# Altium PCB Develop_board.PcbDoc
Units mm, origin at the board's own origin, x right, y up, seen from the top; angles counter-clockwise.
Board outline 45 x 45 mm, 2 copper layers (Top Layer, Bottom Layer); 38 components, 26 nets, 180 pads, 79 vias.
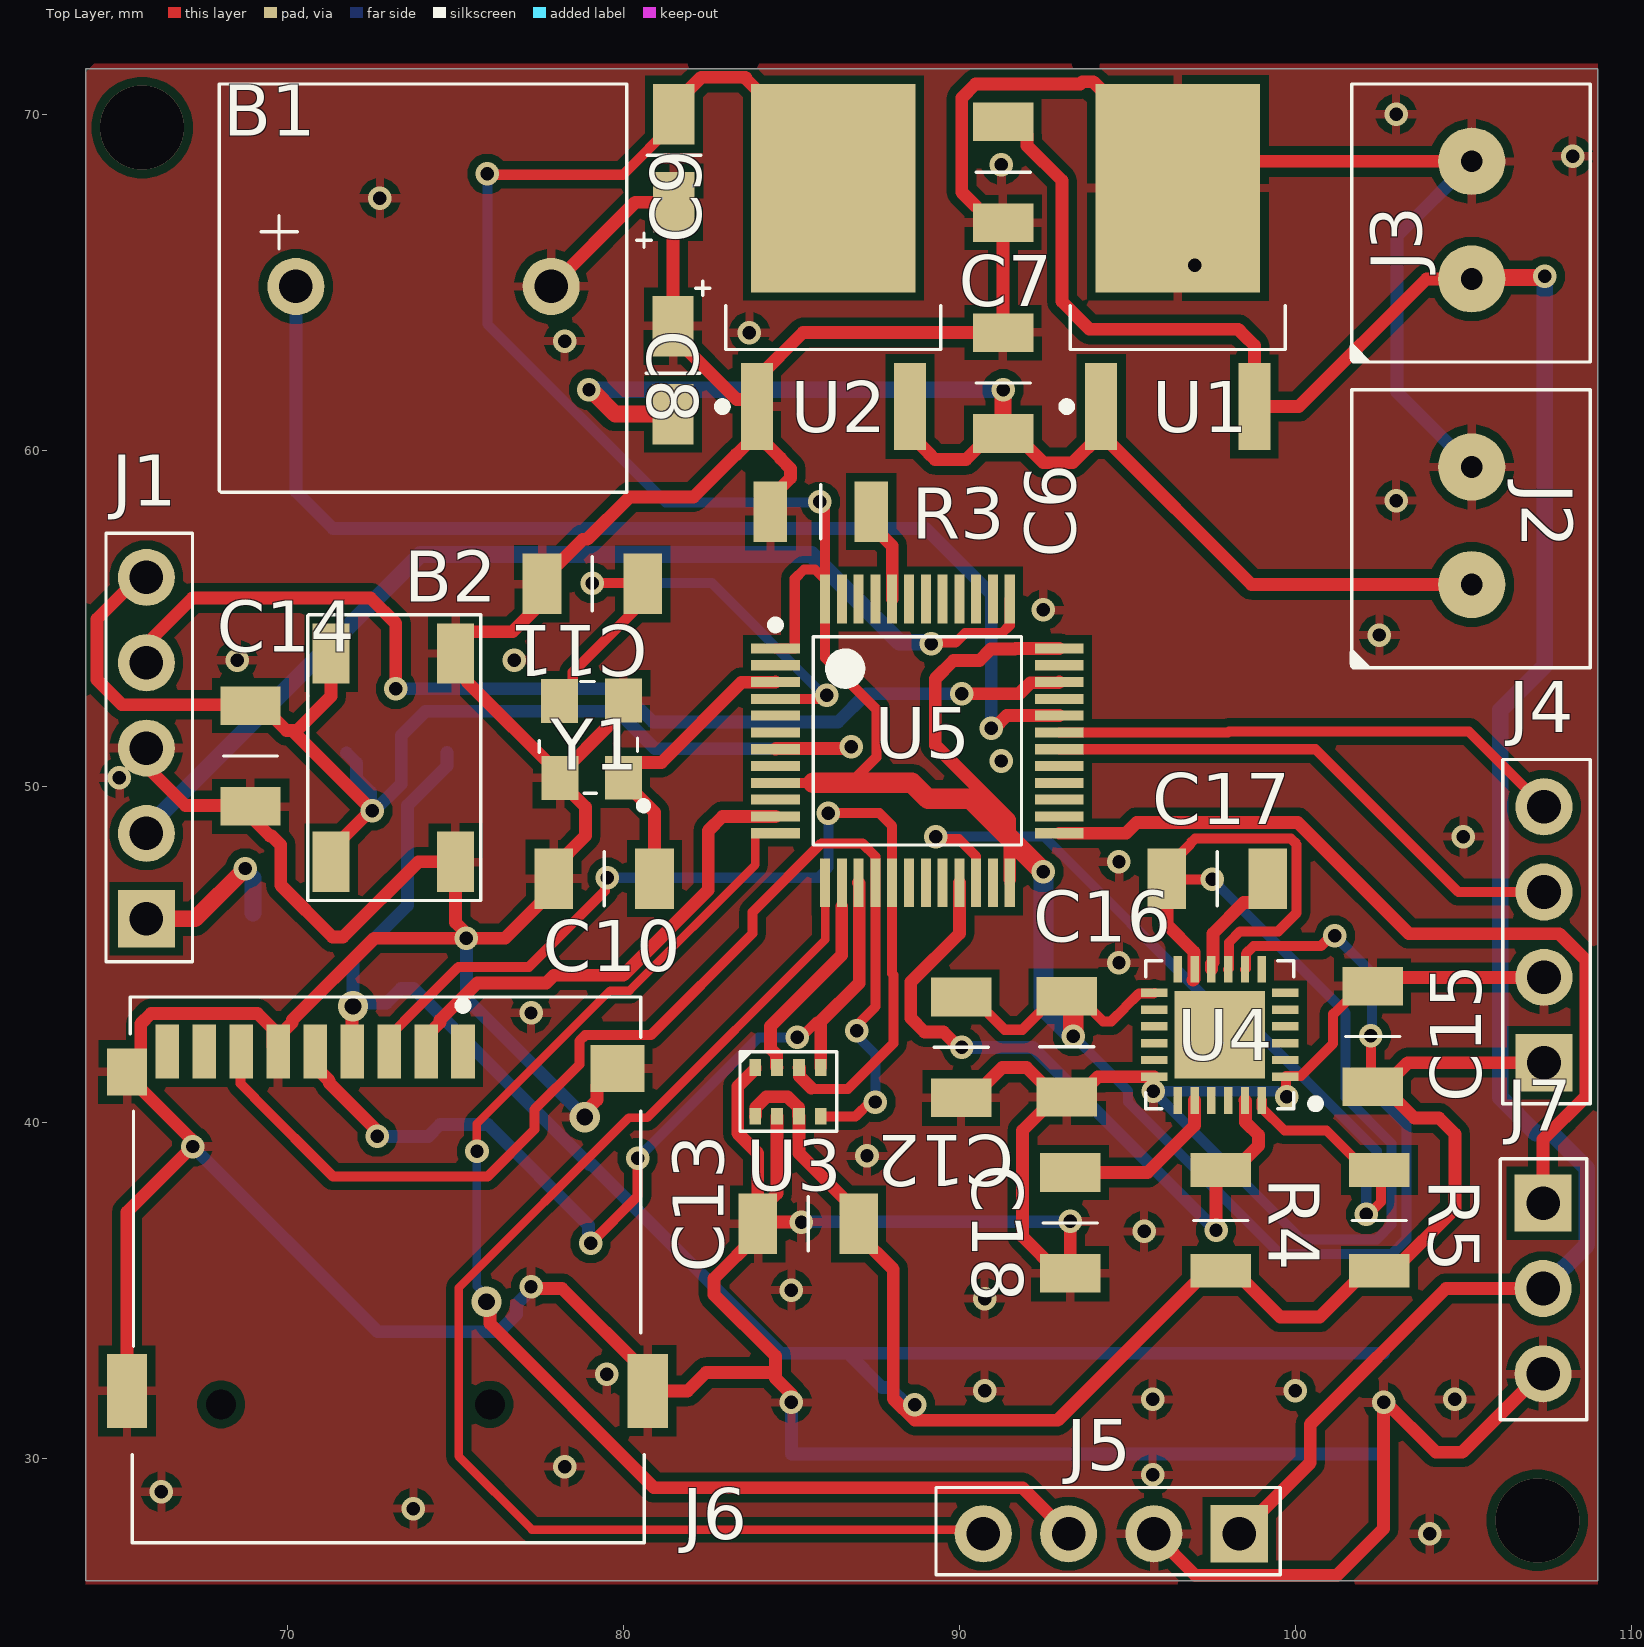
[diagram p0: Top Layer view]
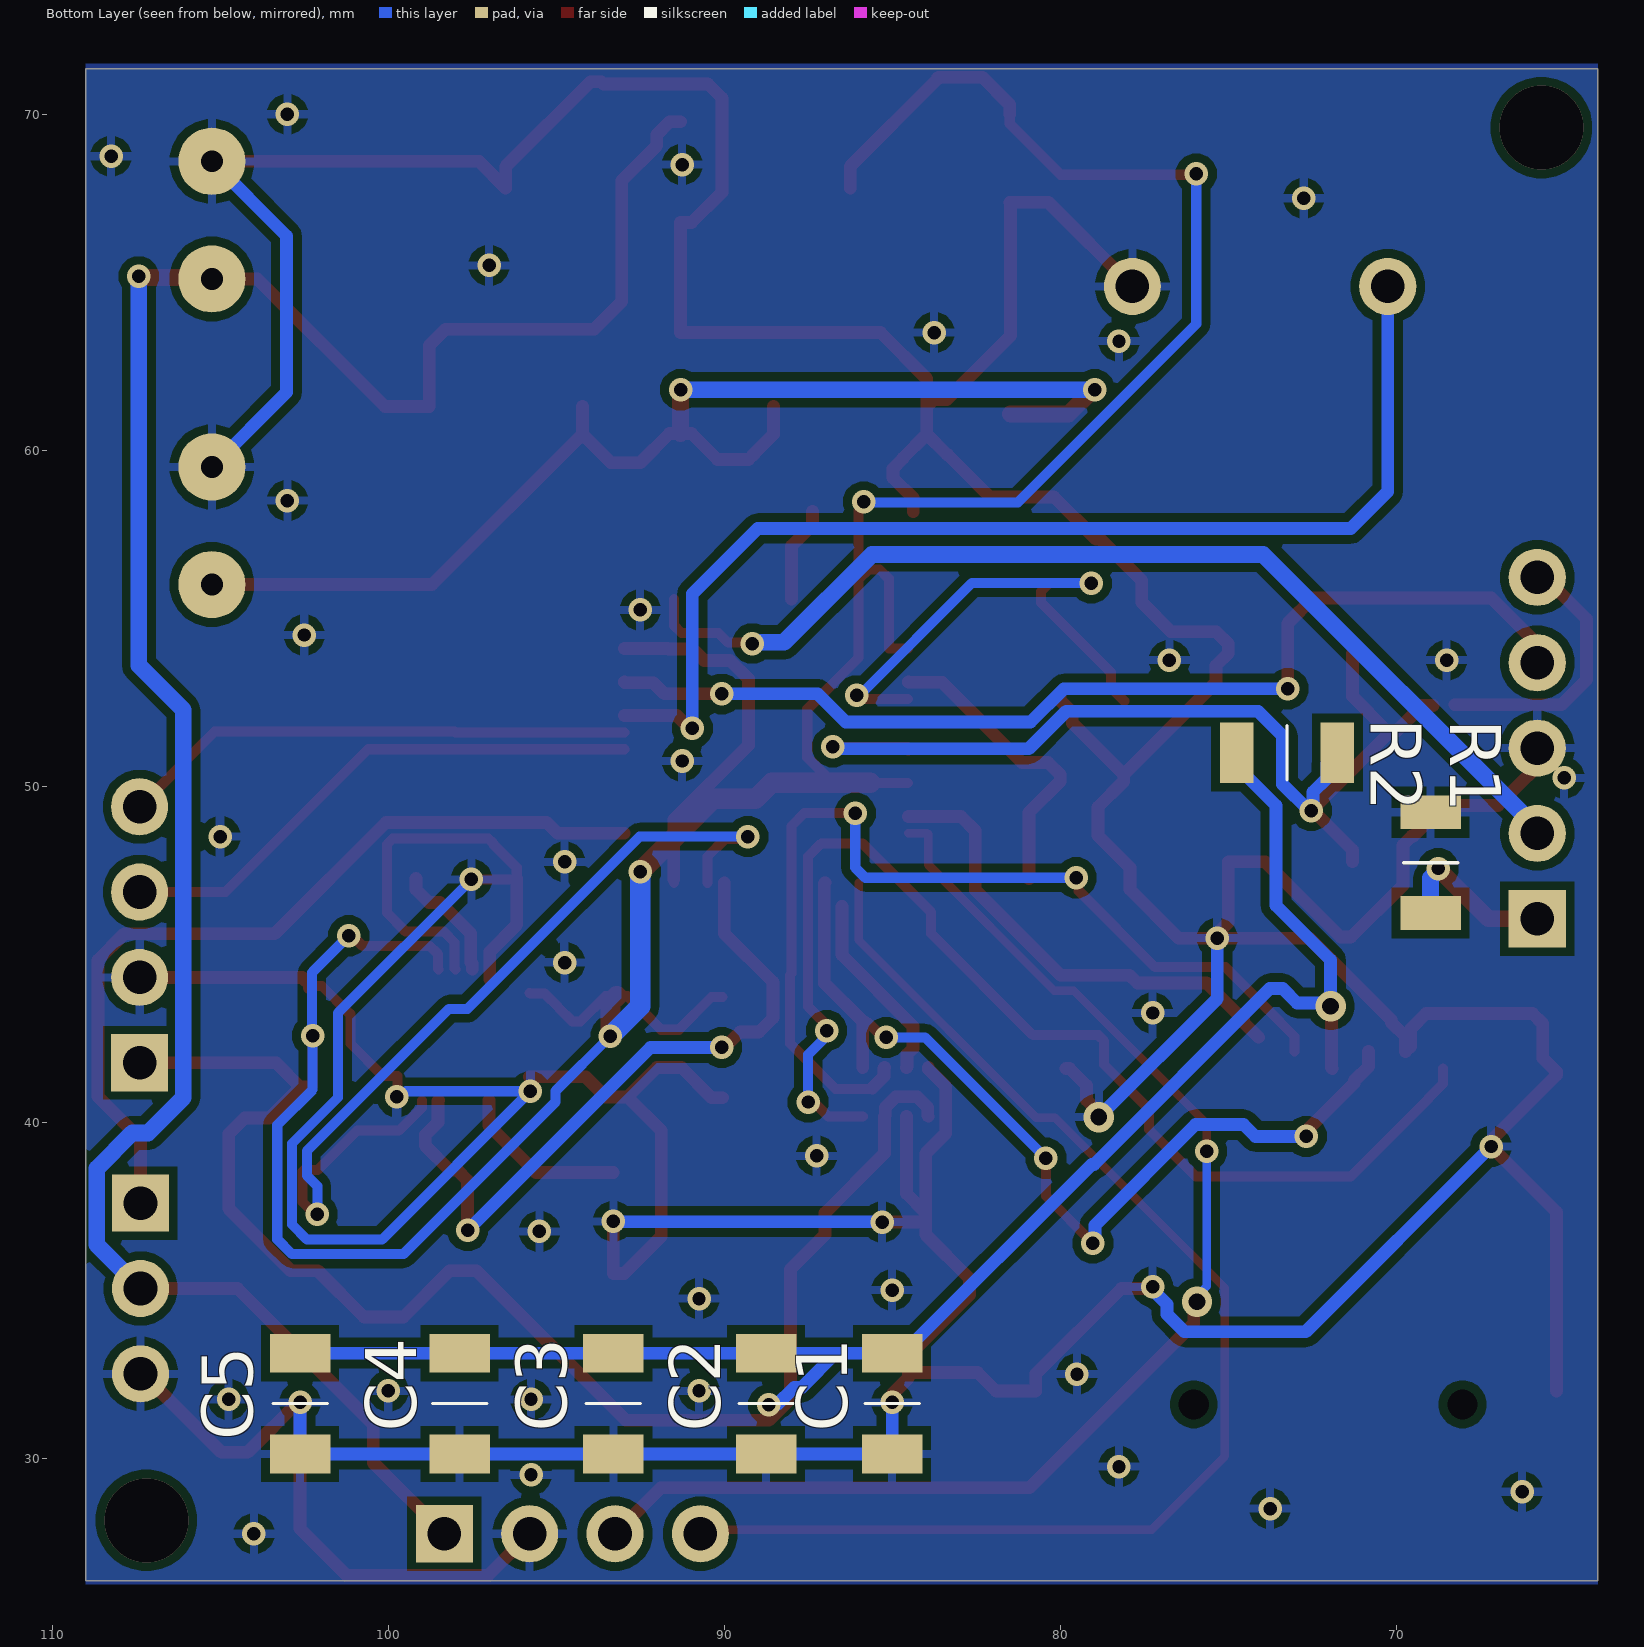
[diagram p1: Bottom Layer view, seen from below]
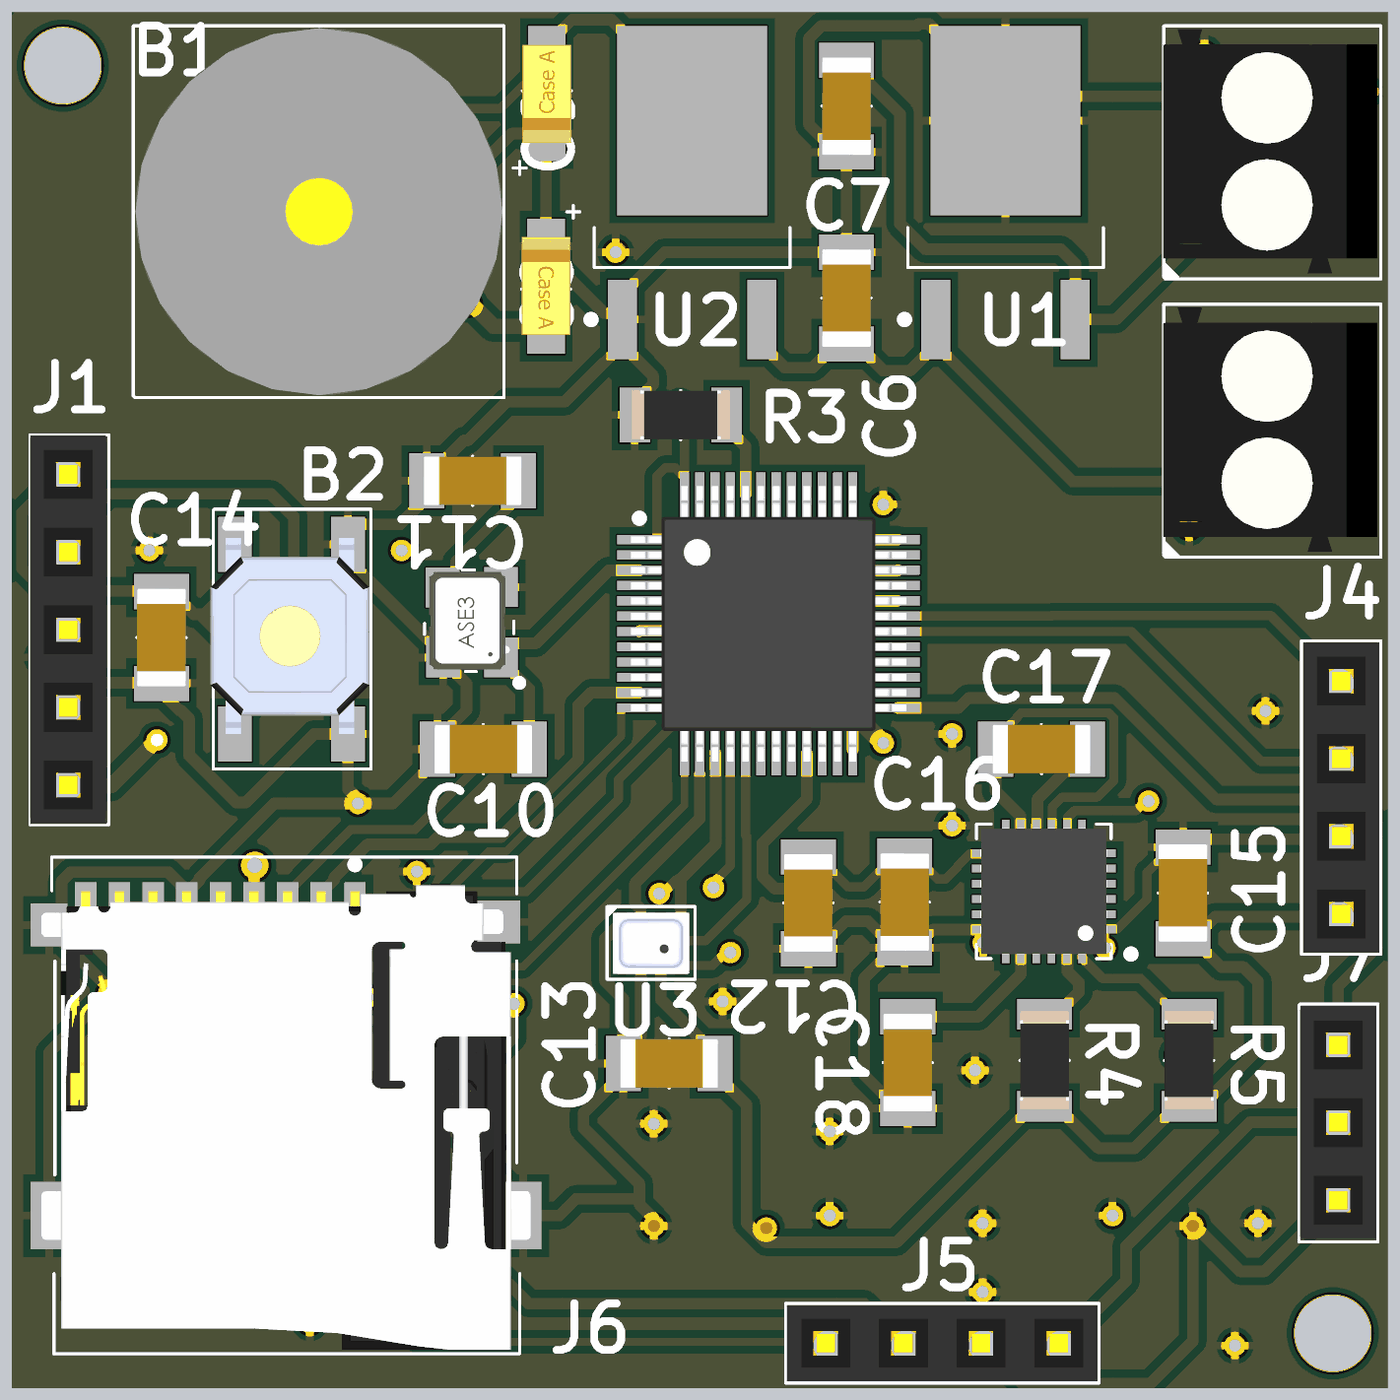
[diagram p2: 3D render of the assembled board from above, using the file's embedded part models]
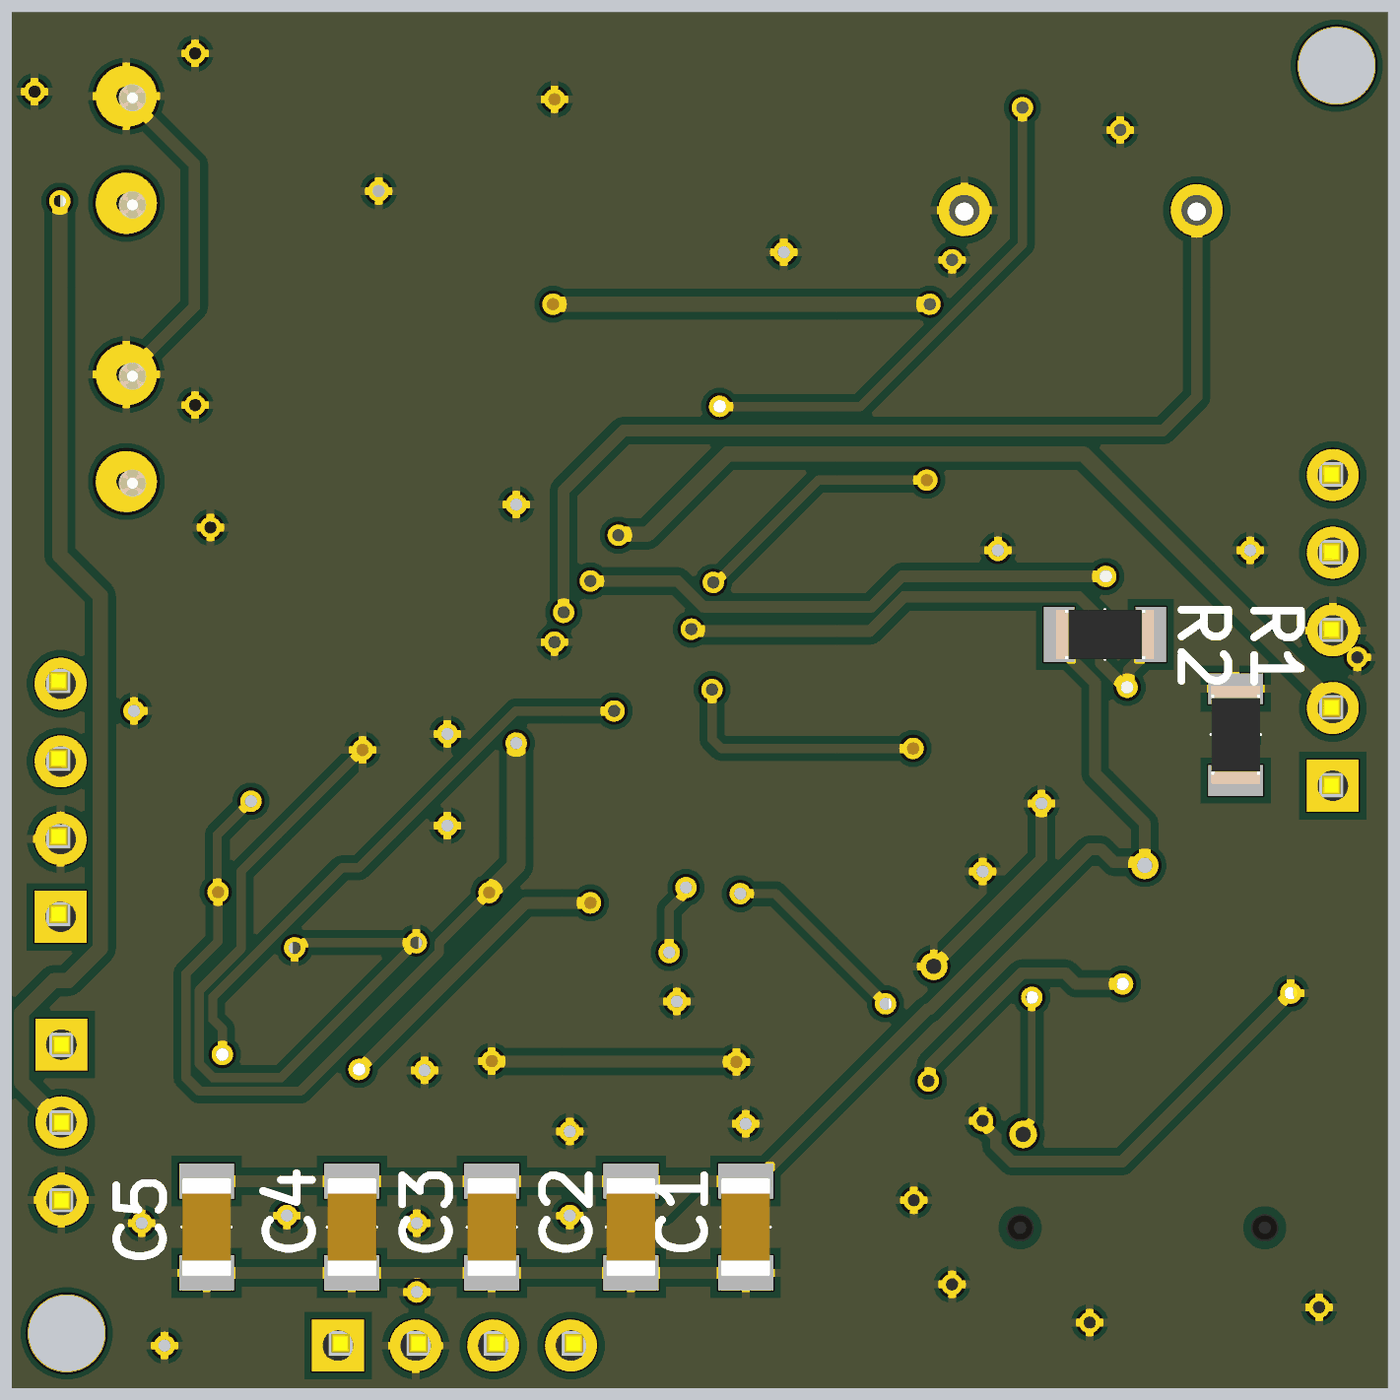
[diagram p3: 3D render of the assembled board from below, using the file's embedded part models]

## Layer stack, top to bottom
Top Solder: solder mask 0.0102, Solder Resist, Dk 3.5
Top Layer: signal copper 0.0356
Dielectric 1: dielectric 0.32, FR-4, Dk 4.8
Bottom Layer: signal copper 0.0356
Bottom Solder: solder mask 0.0102, Solder Resist, Dk 3.5

## Board outline
64,26.35 109,26.35 109,71.35 64,71.35

## Design rules (kind name [scope] priority, off if disabled: settings)
Clearance [All] p1: gap=0.254 ignorepadtopadclearanceinfootprint=FALSE except(0: Arc-Hole Track-Hole SMDPad-Hole THPad-Hole Via-Hole Fill-Hole Poly-Hole Region-Hole Text-Hole; 0.14: Arc-Arc Arc-Track Arc-SMDPad Track-Track Track-SMDPad SMDPad-SMDPad; 0.2: Arc-THPad Track-THPad SMDPad-THPad THPad-THPad)
HoleSize [All] p1: absolutevalues=TRUE maxlimit=2.54 minlimit=0.01 maxpercent=80.000 minpercent=20.000
HoleToHoleClearance [All] p1: gap=0.1 allowstackedmicrovias=TRUE
MinimumSolderMaskSliver [All] p1: minsoldermaskwidth=0.1
PolygonConnect [All] p1: connectstyle=Relief reliefconductorwidth=0.254 reliefentries=4 polygonreliefangle="90 Angle" airgapwidth=0.254
RoutingVias [All] p1: holewidth=0.5 width=0.6 viastyle="Through Hole" minholewidth=0.3 minwidth=0.3 maxholewidth=0.7 maxwidth=0.9
SilkToSilkClearance [All] p1: silktosilkclearance=0.1
SilkToSolderMaskClearance [IsPad] p1: minsilkscreentomaskgap=0.05 clearancetoexposedcopper=TRUE
SolderMaskExpansion [All] p1: expansion=0.102 istentingtop=FALSE
Width [All] p1: maxlimit=1 minlimit=0.1 preferedwidth=0.254 minimp=50.000000 maximp=50.000000 favimp=50.000000
25 further rules are at their usual default settings.

## Components (designator, comment, footprint, x,y, rotation, side; value= is the part's Value field where it differs from the comment)
B1 "Buzzer 5v" "Buzzer 5v" 70.25,64.875 r0 top
B2 "Push Button" "PUSB BUTTON-SMD" 75,53.95 r270 top
C1 "0.1 uF C1206" C1206 84.5,32.2 r270 bottom
C2 "0.1 uF C1206" C1206 88.25,32.2 r270 bottom
C3 "0.1 uF C1206" C1206 92.8,32.2 r270 bottom
C4 "0.1 uF C1206" C1206 97.375,32.2 r270 bottom
C5 "0.1 uF C1206" C1206 102.125,32.2 r270 bottom
C6 "330 nF C1206" C1206 90.8,61.425 r90 top
C7 "0.1 uF C1206" C1206 91.8,68.85 r270 top
C8 "10 uF - Tantal" "C1206- TANTAL" 81.475,62.295 r270 top
C9 "10 uF - Tantal" "C1206- TANTAL" 81.5,68.78 r90 top
C10 "16 pF" C1206 80,46.75 r180 top
C11 "16 pF" C1206 79.65,55.525 r180 top
C12 "0.1 uF C1206" C1206 89.55,41.65 r90 top
C13 "0.1 uF C1206" C1206 84.925,37.475 r0 top
C14 "0.1 uF C1206" C1206 69.4,51.475 r270 top
C15 "0.1 uF C1206" C1206 101.8,41.975 r90 top
C16 "0.1 uF C1206" C1206 93.7,42.825 r270 top
C17 "0.1 uF C1206" C1206 98.25,46.75 r180 top
C18 "2.2 nF c1206" C1206 93.8,37.575 r270 top
J1 "Header 2.54 1x5" "Header 2.54 1x5" 65.8,46.055 r90 top
J2 "Klemens 1x2 3.5mm" "Klemens 1x2 - 3.5mm" 88.5,46.2 r90 top
J3 "Klemens 1x2 3.5mm" "Klemens 1x2 - 3.5mm" 88.5,55.3 r90 top
J4 "Header 2.54 1x4" "Header 2.54 1x4" 106.675,42.27 r90 top
J5 "Header 2.54 1x4" "Header 2.54 1x4" 97.83,27.025 r180 top
J6 "Micro SD Card Holder" "Micro SD Card Holder" 72.541,35.025 r0 top
J7 "Header 2.54 1x3" "Header 2.54 1x3" 107.4,37.59 r270 top
R1 "10K R1206" "R1206 Resistor" 68.975,47.725 r270 bottom
R2 "10K R1206" "R1206 Resistor" 73.25,51 r180 bottom
R3 "10K R1206" "R1206 Resistor" 85.875,58.175 r0 top
R4 "4.7K R1206" "R1206 Resistor" 97.775,37.075 r270 top
R5 "4.7K R1206" "R1206 Resistor" 102.5,37.075 r270 top
U1 "L7805-DPAK" DPAK228P972X230-3N 96.5,65.45 r90 top
U2 "LD108633 DPAK" DPAK228P972X230-3N 86.25,65.45 r90 top
U3 "BMP280" BMP280 84.9,40.9 r0 top
U4 "MPU6050" QFN50P400X400X90_HS-25N 97.75,42.6 r180 top
U5 "STM32F101" LQFP48-STM 88.75,51.35 r0 top
Y1 "8 MHz 12.5 pf Osc" "8 MHZ Osc." 79.51,51.231 r90 top

## Footprints (in the part's own frame and the unit in brackets; to place one, negate y for a bottom-side part, rotate by r counter-clockwise, add the part's x,y. Pads: shape width x height; smd on the part's side, far side on the other; paste and mask are expansions set on the pad)
"8 MHZ Osc." [mm]
  rect 1.3x1.1 smd mask+0.05: 1(-0.981,-0.49) 2(1.319,-0.49) 3(1.303,1.417) 4(-0.986,1.401)
  silkscreen extent -1.91,-1.19 1.88,2.01, body extent -1.38,-0.64 1.82,1.86, height 1.22
BMP280 [mm]
  rect 0.35x0.5 smd mask+0.05: 1(-0.975,0.725) 2(-0.325,0.725) 3(0.325,0.725) 4(0.975,0.725) 5(0.975,-0.725) 6(0.325,-0.725) 7(-0.325,-0.725) 8(-0.975,-0.725)
  silkscreen extent -1.45,-1.17 1.45,1.2, body extent -1.24,-1 1.26,1, height 0.95
"Buzzer 5v" [mm]
  round 1.7 hole 1 mask+0.05: 1(0,0) 2(7.6,0)
  silkscreen extent -2.27,-6.12 9.85,6.02, body extent -2.2,-6.05 9.8,5.95, height 9.5
C1206 [mm]
  rect 1.15x1.8 smd mask+0.05: 1(-0.925,-0.5) 2(2.075,-0.5)
  silkscreen extent 0.58,-1.3 0.58,0.31, body extent -1.02,-1.3 2.18,0.3, height 1
"C1206- TANTAL" [mm]
  rect 1.8x1.23 smd mask+0.05: 1(-1.4,0) 1(-1.4,0) 2(1.22,0)
  silkscreen extent -2.74,-0.8 0,1.1, body extent -1.7,-0.8 1.5,0.8, height 1.62
DPAK228P972X230-3N [mm] "D-PAK, 3-Pads, Body 6,40x6,56mm (max), IPC Medium Density"
  rect 2.6x0.95 smd mask+0.05: 1(-4.15,2.28) 2(-4.15,-2.28)
  rect 6.2x4.9 smd mask+0.05: 3(2.35,0)
  silkscreen extent -4.27,-3.2 -1.15,3.43, body extent -2.5,-3.2 4.1,3.2, height 2.3
"Header 2.54 1x3" [mm]
  rect 1.7x1.7 hole 1 mask+0.05: 1(0,-0.025)
  round 1.7 hole 1 mask+0.05: 2(2.54,-0.025) 3(5.08,-0.025)
  silkscreen extent -1.33,-1.3 6.45,1.28, body extent -1.26,-1.27 6.36,1.23, height 9.1
"Header 2.54 1x4" [mm]
  rect 1.7x1.7 hole 1 mask+0.05: 1(-0.5,-0.725)
  round 1.7 hole 1 mask+0.05: 2(2.04,-0.725) 3(4.58,-0.725) 4(7.12,-0.725)
  silkscreen extent -1.73,-2.1 8.52,0.5, body extent -1.68,-2.05 8.48,0.45, height 9.1
"Header 2.54 1x5" [mm]
  rect 1.7x1.7 hole 1 mask+0.05: 1(0,0)
  round 1.7 hole 1 mask+0.05: 2(2.54,0) 3(5.08,0) 4(7.62,0) 5(10.16,0)
  silkscreen extent -1.28,-1.37 11.48,1.2, body extent -1.25,-1.3 11.45,1.2, height 9.1
"Klemens 1x2 - 3.5mm" [mm]
  round 2 hole 0.65: 1(9.8,-16.75) 2(13.3,-16.75)
  silkscreen extent 7.29,-20.28 15.6,-13.12, body extent 7.5,-20.15 15.49,-13.15, height 8.9
LQFP48-STM [mm] "TSQFP, 48-Leads, Body 7,00x7,00mm, Pitch 0,50mm, IPC Medium Density"
  rect 1.45x0.3 smd mask+0.05: 1(-4.225,2.75) 2(-4.225,2.25) 3(-4.225,1.75) 4(-4.225,1.25) 5(-4.225,0.75) 6(-4.225,0.25) 7(-4.225,-0.25) 8(-4.225,-0.75) 9(-4.225,-1.25) 10(-4.225,-1.75) 11(-4.225,-2.25) 12(-4.225,-2.75) 25(4.225,-2.75) 26(4.225,-2.25) 27(4.225,-1.75) 28(4.225,-1.25) 29(4.225,-0.75) 30(4.225,-0.25) 31(4.225,0.25) 32(4.225,0.75) 33(4.225,1.25) 34(4.225,1.75) 35(4.225,2.25) 36(4.225,2.75)
  rect 0.3x1.45 smd mask+0.05: 13(-2.75,-4.225) 14(-2.25,-4.225) 15(-1.75,-4.225) 16(-1.25,-4.225) 17(-0.75,-4.225) 18(-0.25,-4.225) 19(0.25,-4.225) 20(0.75,-4.225) 21(1.25,-4.225) 22(1.75,-4.225) 23(2.25,-4.225) 24(2.75,-4.225) 37(2.75,4.225) 38(2.25,4.225) 39(1.75,4.225) 40(1.25,4.225) 41(0.75,4.225) 42(0.25,4.225) 43(-0.25,4.225) 44(-0.75,4.225) 45(-1.25,4.225) 46(-1.75,4.225) 47(-2.25,4.225) 48(-2.75,4.225)
  silkscreen extent -4.35,-3.1 3.1,3.57, body extent -4.5,-4.5 4.5,4.5, height 1.6
"Micro SD Card Holder" [mm]
  rect 0.7x1.6 smd paste+0 mask+0: 1(2.684,7.075) 2(1.584,7.075) 3(0.484,7.075) 4(-0.616,7.075) 5(-1.716,7.075) 6(-2.816,7.075) 7(-3.916,7.075) 8(-5.016,7.075) Cd(-6.116,7.075)
  rect 1.2x1.4 smd paste+0 mask+0: 10(-7.316,6.475)
  rect 1.6x1.4 smd paste+0 mask+0: 11(7.284,6.575)
  rect 1.2x2.2 smd paste+0 mask+0: 12(-7.316,-3.025) 13(8.184,-3.025)
  round 0 hole 0.9 unplated paste-1000 mask+0: ""(-4.516,-3.425) ""(3.484,-3.425)
  silkscreen extent -7.22,-7.55 8.08,8.7, body extent -7.57,-7.42 8.43,7.83, height 1.85
"PUSB BUTTON-SMD" [mm]
  rect 1.8x1.1 smd mask+0.05: 1(0,0) 2(6.2,0) 3(0,-3.7) 4(6.2,-3.7)
  silkscreen extent -1.15,-4.4 7.35,0.75, body extent -0.2,-4.5 6.2,0.7, height 1.5
QFN50P400X400X90_HS-25N [mm] "QFN, 24-Leads, Body 4,00x4,00mm, Pitch 0,50mm, Thermal Pad 2,70x2,60mm, IPC Medium Density"
  rect 0.8x0.25 smd mask+0.05: 1(-1.95,1.25) 2(-1.95,0.75) 3(-1.95,0.25) 4(-1.95,-0.25) 5(-1.95,-0.75) 6(-1.95,-1.25) 13(1.95,-1.25) 14(1.95,-0.75) 15(1.95,-0.25) 16(1.95,0.25) 17(1.95,0.75) 18(1.95,1.25)
  rect 0.25x0.8 smd mask+0.05: 7(-1.25,-1.95) 8(-0.75,-1.95) 9(-0.25,-1.95) 10(0.25,-1.95) 11(0.75,-1.95) 12(1.25,-1.95) 19(1.25,1.95) 20(0.75,1.95) 21(0.25,1.95) 22(-0.25,1.95) 23(-0.75,1.95) 24(-1.25,1.95)
  rect 2.7x2.6 smd mask+0.05: 25(0,0)
  silkscreen extent -2.98,-2.2 2.2,2.2, body extent -2.07,-2.07 2.07,2.07, height 0.9
"R1206 Resistor" [mm]
  rect 1x1.8 smd mask+0.05: 1(-1.5,0) 2(1.5,0)
  silkscreen extent 0,-0.8 0,0.81, body extent -1.6,-0.8 1.6,0.81, height 0.55

## Part data
B2: "Smd Push Button", Satın Alma Linki=https://urun.n11.com/diger/mini-pushbutton-switch-smd-P227461537?gclid=Cj0KCQjwkoDmBRCcARIsAG3xzl8Y_-jeD7HocNM6lvuZ_rVp83568XPGtNzlPwXWLph8oCRqo0yh87UaApZYEALw_wcB&gclsrc=aw.ds
R1: library part "4.7K R1206", "4.7K R1206"
U1: "L7805 5V REGULATOR. SMD PAKET"
U2: "LD1086 3.3V REGULATOR"
U3: "BMP280 SENSOR"
U4: "MPU6050 GYRO SENSOR"
U5: "STM32F101 48 PİNLİ MİKROİŞLEMCİ"

## Via types
v1: diameter 0.7, hole 0.4, Top Layer to Bottom Layer, 74 vias
v2: diameter 0.9, hole 0.5, Top Layer to Bottom Layer, 3 vias
v3: diameter 2.5, hole 2.5, Top Layer to Bottom Layer, 2 vias

## Nets (pads, with @x,y where several pads share a name; then routed paths per layer and width w, separated by ;. In a path a pad name is that pad's centre, name@x,y a point inside that pad or via, vN(x,y) a via of type N, cw(c..) or ccw(c..) an arc to the next point about the centre after c; other vN are vias at no path point)
3.3V: C1.1 C2.1 C3.1 C4.1 C5.1 C9.2 C12.2 C13.2 C15.1 C16.1 J4.1 J6.4 R2.1 R4.2 R5.2 U2.3 U3.6 U3.8 U4.8 U4.13 U5.1 U5.9 U5.24 U5.36 U5.48 | length 196.3
  Top Layer w0.3: v1(75.95,68.225) 75.975,68.2 79.985,68.2 81.5,69.715 C9.2 ; U5.9 85.646,50.1 ; U5.1 85.1,54.1 85.1,56.175 85.376,56.451 85.699,56.451 U5.48@86,56.15 ; v1(85.85,58.462) 85.85,58.353 86,58.203 U5.48@86,56.15 ; 86.77,50.104 87.529,50.863 87.529,52.294 86,53.823 U5.48 U5.48@86,56.15 ; C12.2 90.375,43.725 91.35,42.75 91.875,42.75 92.875,43.75 C16.1 93.525,43.75 94.275,43 94.524,43 94.932,43.408 94.932,43.417 95.34,43.825 95.775,43.825 U4.13 ; U5.24 U5.24@91.5,47.225 ; U4.8 98.525,44.575 98.525,45.01 98.755,45.24 100.757,45.24 101.067,45.55 v1(101.175,45.55) ; v1(102.25,42.575) 102.25,41.1 C15.1
  Top Layer w0.381: J6.4@71.9,41.6 71.925,41.625 71.925,43.425 v2(71.95,43.45) ; C9.2 81.5,70.285 82.315,71.1 83.625,71.1 83.65,71.075 83.65,71.05 86.25,68.45 U2.3 ; U3.8 83.941,40.19 83.941,40.433 84.263,40.755 84.887,40.755 85.21,40.433 85.21,40.19 U3.6 85.225,39.075 87,37.3 87,36.65 88.03,35.62 88.03,31.77 88.675,31.125 92.925,31.125 97.375,35.575 98.175,35.575 99.55,34.2 100.725,34.2 102.1,35.575 R5.2 102.9,35.575 104.75,37.425 104.75,39.65 104.273,40.127 103.548,40.127 C15.1@102.625,41.05 ; U5.24@91.5,47.225 91.5,48.45 91.5,49 89.28,51.22 89.28,53.199 89.826,53.745 90.596,53.745 90.931,54.08 91.658,54.08 91.679,54.1 U5.36 ; C15.1 C15.1@102.625,41.05 ; J4.1 103.345,41.77 C15.1@102.625,41.05
  Top Layer w0.6: 85.646,50.1 85.65,50.104 86.77,50.104 88.585,50.104 89.064,49.625 90.325,49.625 91.5,48.45 v1(92.5,47.45) ; C16.1 93.387,43.563 v1(93.387,42.562)
  Bottom Layer w0.3: v1(75.95,68.225) 75.95,63.759 81.259,58.45 85.838,58.45 v1(85.85,58.462) ; v1(93.387,42.562) 95.017,40.932 95.017,40.608 99.554,36.071 102.862,36.071 103.304,36.513 103.304,39.913 102.25,40.967 v1(102.25,42.575) 102.275,42.6 102.275,44.45 ; v1(101.175,45.55) 102.25,44.475
  Bottom Layer w0.381: R2.1 74.75,50.6 73.575,49.425 73.575,46.45 71.95,44.825 v2(71.95,43.45) 72.049,43.549 72.952,43.549 73.378,43.976 73.759,43.976 78.992,38.743 79.057,38.743 84.675,33.125 86.675,33.125 ; v1(88.675,31.589) 88.434,31.589 87.918,32.106 87.694,32.106 86.675,33.125 ; C5.1 C4.1 C3.1 C2.1 86.675,33.125
  Bottom Layer w0.6: v1(92.5,47.45) 92.5,43.449 v1(93.387,42.562)
5V: C7.1 J3.1 J5.1 J7.2 U1.2 | length 69.9
  Top Layer w0.381: C7.1 91.625,69.775 92.009,69.39 92.009,69.065 93.05,68.025 93.05,64.425 93.875,63.6 98.3,63.6 98.475,63.425 98.78,63.12 U1.2 100.1,61.3 103.9,65.1 J3.1 ; J5.1 100.444,29.864 100.444,31.006 104.487,35.05 J7.2
  Top Layer w0.5: J3.1 105.287,65.137 107.387,65.137 v1(107.425,65.175)
  Bottom Layer w0.5: J7.2 108.675,36.35 108.675,38.626 107.621,39.68 107.154,39.68 106.1,40.734 106.1,52.265 107.425,53.59 v1(107.425,65.175)
12V: C6.1 C8.2 J2.1 U1.1 U2.2 | length 38
  Top Layer w0.381: U2.2 88.53,60.475 89.075,59.93 89.075,59.925 89.275,59.725 90.2,59.725 90.975,60.5 C6.1 91.625,60.5 92.5,59.625 93.37,59.625 U1.1@94.22,60.475 ; U1.1 U1.1@94.22,60.475 ; J2.1 98.695,56 U1.1@94.22,60.475
  Top Layer w0.5: v1(78.975,61.8) 79.029,61.8 79.754,61.075 C8.2 ; C6.1 v1(91.3,61.8)
  Bottom Layer w0.5: v1(78.975,61.8) v1(91.3,61.8)
GND: B1.2 B2.1 B2.2 C1.2 C2.2 C3.2 C4.2 C5.2 C6.2 C7.2 C8.1 C9.1 C10.2 C11.2 C12.1 C13.1 C14.2 C15.2 C16.2 C17.2 C18.2 J1.3 J2.2 J3.2 J4.2 J5.2 J6.6 J6.10 J6.11 J6.12 J6.13 J7.3 R1.1 R3.1 U1.3 U2.1 U3.1 U3.7 U4.1 U4.9 U4.11 U4.18 Y1.2 Y1.4 | length 289
  Top Layer w0.3: v1(95.771,40.92) 95.785,40.935 95.785,41.336 U4.18 ; v1(97.525,47.225) 96.2,47.225 C17.2 96.175,47.575 96.875,48.275 96.875,48.3 97.015,48.44 99.87,48.44 100.04,48.27 100.04,46.23 99.49,45.68 98.355,45.68 98.025,45.35 98.025,44.575 U4.9 ; v1(99.747,40.752) 99.724,40.776 99.724,41.374 99.725,41.375 100.16,41.375 101.125,42.34 101.125,43.225 101.15,43.25 101.175,43.25 101.975,44.05 C15.2
  Top Layer w0.381: J6.12 65.225,37.325 v1(67.175,39.275) 67.114,39.336 67.114,39.511 65.225,41.4 J6.10 65.635,41.909 65.635,42.927 65.938,43.231 69.112,43.231 69.565,42.777 69.565,42.26 J6.6 69.725,42.55 70.144,42.969 70.144,43.037 72.583,45.475 v1(75.325,45.475) ; J1.3@65.25,51.14 66.965,49.425 68.575,49.425 69.481,48.519 69.531,48.519 69.8,48.25 69.8,47.05 71.342,45.508 71.658,45.508 73.9,47.75 B2.2 75,45.94 75.325,45.615 v1(75.325,45.475) ; v1(77.25,35.1) 77.297,35.053 78.172,35.053 80.725,32.5 J6.13 81.909,32 82.459,32.55 84.525,32.55 ; B1.2 80.355,67.38 81.5,67.38 81.475,67.355 81.475,63.695 81.475,63.41 83.375,61.51 83.76,61.51 U2.1 ; v2(78.85,40.15) 78.85,40.29 79.215,40.656 79.215,41.09 79.725,41.6 J6.11 ; Y1.2@80,52.65 Y1.2 79.64,52.191 79.64,51.877 Y1.4@78.109,50.345 ; U3.1 83.925,41.581 83.404,41.06 83.404,39.67 84,39.074 C13.1@84,37.3 ; R3.1 84.375,58.575 84.975,59.175 84.975,59.45 84.675,59.75 84.675,59.77 U2.1@83.97,60.475 ; U3.7 84.575,37.875 C13.1@84,37.3 ; v1(85,31.661) 85,31.902 84.525,32.377 84.525,32.55 ; v1(85.3,37.025) 84.05,37.025 C13.1 ; C12.1 90.375,40.725 91.275,41.625 92,41.625 C16.2@92.875,40.75 ; v1(93.3,37.05) C18.2 92.975,35.5 91.875,36.6 91.875,39.75 C16.2@92.875,40.75 ; J5.2 97.03,26.509 101.235,26.509 102.625,27.9 102.625,31.8 102.625,31.734 104.184,30.175 104.97,30.175 107.305,32.51 J7.3 ; U4.18 94.125,41.35 93.525,40.75 C16.2 C16.2@92.875,40.75 ; C17.2 96.175,45.874 96.979,45.07 96.979,44.254 U4.11@96.956,44.231 ; C15.2@102.35,44 C15.2 102.56,44.31 J4.2 ; J3.2 97.3,68.6 U1.3 96.5,68.45 93.983,70.967 93.667,70.967 93.6,70.9 90.483,70.9 90.069,70.487 90.069,67.68 90.975,66.775 C7.2 C6.2 85.345,63.5 83.97,62.125 U2.1 ; v1(75.325,45.475) 76.475,45.475 77.925,46.925 C10.2 77.925,47.575 78.875,48.525 78.875,49.38 78.109,50.145 Y1.4 Y1.4@78.109,50.345 ; Y1.4@78.109,50.345 75.36,53.095 75.36,53.59 B2.1 75,54.24 75.36,54.6 76.7,54.6 77.575,55.475 77.575,55.8 77.575,56.125 78.8,57.35 78.925,57.35 80.188,58.613 82.088,58.613 83.35,59.875 83.37,59.875 U2.1@83.97,60.475 ; U2.1@83.97,60.475 U2.1 ; C13.1 84,36.65 82.7,35.35 82.7,34.863 84.525,33.038 84.525,32.55 ; C13.1 C13.1@84,37.3
  Bottom Layer w0.3: v1(97.525,47.225) 101.496,43.254 101.496,40.733 102.864,39.365 102.864,36.953 102.422,36.511 100.18,36.511 v1(95.771,40.92) 99.471,40.92 99.639,40.752 v1(99.747,40.752)
  Bottom Layer w0.381: v1(67.175,39.275) 72.689,33.761 76.296,33.761 76.82,34.285 76.82,34.583 77.25,35.014 v1(77.25,35.1) ; v1(75.325,45.475) 75.325,43.675 v2(78.85,40.15) ; v1(85,31.661) C1.2 C2.2 C3.2 C4.2 C5.2 v1(102.625,31.661) ; v1(85.3,37.025) 85.312,37.038 93.287,37.038 v1(93.3,37.05) ; J2.2 103.025,61.725 103.025,66.375 J3.2
  other v1: 104,27.75 73.75,28.5 66.25,29 95.75,29.5 78.25,29.75 95.75,31.75 104.75,31.75 90.75,32 100,32 79.5,32.5 90.75,34.75 85,35 95.5,36.75 87.25,39 77.25,43.25 94.75,44.75 94.75,47.75 105,48.5 65,50.25 91.25,50.75 68.5,53.75 76.75,53.75 102.5,54.5 92.5,55.25 103,58.5 78.25,63.25 83.75,63.5 97,65.5 72.75,67.5 91.25,68.5 108.25,68.75 103,70
NetB1_1: B1.1 U5.32 | length 34.2
  Top Layer w0.381: v1(90.95,51.725) 91.036,51.725 91.411,52.1 U5.32
  Bottom Layer w0.381: B1.1 70.25,58.77 71.353,57.667 89.001,57.667 90.95,55.719 v1(90.95,51.725)
NetC10_1: C10.1 U5.3 Y1.1 | length 9.1
  Top Layer w0.381: C10.1 80.925,49.225 80,50.15 Y1.1 80,50.35 80.36,50.71 81.135,50.71 83.518,53.093 84.517,53.093 U5.3
NetC11_1: C11.1 U5.4 Y1.3 | length 15.8
  Top Layer w0.3: Y1.3 78.493,52.935 78.493,53.393 80.575,55.475 80.575,55.8 80.329,56.046 v1(79.075,56.046) ; U5.4 85.845,52.6 85.947,52.702 v1(86.055,52.702)
  Bottom Layer w0.3: v1(79.075,56.046) 82.629,56.046 85.973,52.702 v1(86.055,52.702)
NetC17_1: C17.1 U4.10 | length 3.6
  Top Layer w0.381: U4.10 97.5,44.715 97.545,44.76 97.545,45.62 98.465,46.541 98.79,46.541 99.175,46.925 C17.1
NetC18_1: C18.1 U4.20 | length 5
  Top Layer w0.381: C18.1 95.6,38.5 97,39.9 U4.20
NetJ1_2: J1.2 U5.37 | length 31.3
  Top Layer w0.3: v1(89.165,54.246) 89.189,54.271 89.886,54.271 90.175,54.56 91.27,54.56 91.5,54.79 U5.37
  Bottom Layer w0.5: J1.2 65.8,48.743 73.957,56.9 85.599,56.9 88.215,54.284 89.126,54.284 v1(89.165,54.246)
NetJ1_4: J1.4 U5.34 | length 31.8
  Top Layer w0.381: J1.4@65.25,53.68 67.17,55.6 72.475,55.6 73.225,54.85 v1(73.225,52.9) ; v1(90.075,52.75) 91.783,52.75 92.113,53.081 92.955,53.081 U5.34
  Bottom Layer w0.381: v1(73.225,52.9) 79.889,52.9 80.881,51.908 86.384,51.908 87.226,52.75 v1(90.075,52.75) v1@90.014,52.811
NetJ4_3: J4.3 U5.30 | length 16.2
  Top Layer w0.3: U5.30 100.6,51.1 104.85,46.85 J4.3
NetJ4_4: J4.4 U5.31 | length 15.4
  Top Layer w0.3: U5.31 98,51.6 98.025,51.625 105.165,51.625 J4.4
NetJ5_3: J5.3 U5.12 | length 38.9
  Top Layer w0.253: v1(75.642,39.133) 75.642,39.957 79.603,43.918 80.182,43.918 83.926,47.663 83.926,48.577 83.95,48.6 U5.12
  Top Layer w0.381: v2(75.925,34.655) 76.024,34.556 76.024,34.008 80.912,29.121 91.879,29.121 J5.3
  Bottom Layer w0.253: v1(75.642,39.133) 75.642,35.114 75.925,34.831 v2(75.925,34.655)
NetJ5_4: J5.4 U5.13 | length 38.5
  Top Layer w0.253: U5.13 86,45.423 80.71,40.134 80.159,40.134 75.094,35.069 75.094,30.055 77.275,27.875 90.585,27.875 J5.4
NetJ6_2: J6.2 U5.11 | length 14.2
  Top Layer w0.381: J6.2@74.1,42.525 74.544,42.969 74.544,43.037 75.648,44.14 77.703,44.14 77.938,44.375 79.992,44.375 82.525,46.908 82.525,48.675 82.95,49.1 U5.11
NetJ6_3: J6.3 U3.3 U5.17 | length 29.7
  Top Layer w0.3: J6.3 73.025,42.55 73.485,43.01 73.485,43.02 75.086,44.621 77.181,44.621 79.448,46.888 79.448,47.198 v1(79.525,47.275) ; 85.591,41.016 85.62,40.988 86.68,40.988 88.039,42.347 88.039,44.386 88,44.425 U5.17 88,48.817 87.617,49.2 v1(86.1,49.2)
  Top Layer w0.381: U3.3 85.241,41.61 85.241,41.367 85.591,41.016
  Bottom Layer w0.3: v1(79.525,47.275) 85.8,47.275 86.1,47.575 v1(86.1,49.2)
NetJ6_5: J6.5 U3.4 U5.15 | length 27.8
  Top Layer w0.3: v1(79.025,36.4) 80.425,37.8 v1(80.425,38.925) ; v1(85.175,42.525) 85.283,42.525 85.76,43.002 85.875,43.002
  Top Layer w0.381: J6.5 70.825,41.65 71.244,41.231 71.244,41.163 72.614,39.794 72.614,39.636 v1(72.675,39.575) ; U3.4 85.875,43.002 87.02,44.146 87.02,47.106 U5.15
  Bottom Layer w0.3: v1(80.425,38.925) 84.025,42.525 v1(85.175,42.525)
  Bottom Layer w0.381: v1(72.675,39.575) 74.19,39.575 74.542,39.928 75.971,39.928 78.964,36.935 78.964,36.461 v1(79.025,36.4)
NetJ6_7: J6.7 U3.5 U5.16 | length 35.5
  Top Layer w0.3: J6.7@68.6,41.6 68.6,41.15 69.018,40.732 69.018,40.722 71.361,38.379 75.954,38.379 77.357,39.782 77.357,40.382 78.694,41.719 78.694,42.42 78.864,42.59 80.815,42.59 83.84,45.615 83.84,46.25 85.89,48.3 87.11,48.3 87.5,47.91 U5.16 87.5,43.437 86.95,42.887 v1(86.95,42.725) ; U3.5 86.913,40.175 87.338,40.6 v1(87.5,40.6)
  Bottom Layer w0.3: v1(86.95,42.725) 86.95,42.563 87.5,42.013 v1(87.5,40.6)
NetJ7_1: J7.1 U5.25 | length 25.3
  Top Layer w0.381: U5.25 94.96,48.6 95.281,48.921 100.069,48.921 103.38,45.61 107.855,45.61 108.641,44.824 108.641,40.758 107.375,39.493 J7.1
NetR3_2: R3.2 U5.44 | length 2.9
  Top Layer w0.381: R3.2 87.375,57.775 88,57.15 U5.44
NetR4_1: R4.1 U4.23 U5.21 | length 21
  Top Layer w0.381: U5.21 90,45.617 88.551,44.168 88.551,43.099 88.964,42.686 89.527,42.686 89.989,42.225 v1(90.075,42.225) ; v1(97.638,36.779) 97.638,38.266 97.948,38.575 98.175,38.575 98.9,39.3 98.9,39.616 98.52,39.996 98.52,40.631 U4.23
  Bottom Layer w0.381: v1(90.075,42.225) 92.192,42.225 v1(97.638,36.779)
NetR5_1: R5.1 U4.24 U5.22 | length 27.3
  Top Layer w0.3: v1(89.3,48.5) 89.377,48.423 89.987,48.423 90.5,47.91 U5.22 ; U4.24 99,40.425 99.675,39.75 100.925,39.75 102.1,38.575 R5.1 102.55,38.525 102.55,37.626 102.189,37.265 v1(102.11,37.265)
  Bottom Layer w0.3: v1(89.3,48.5) 92.516,48.5 97.643,43.373 98.192,43.373 102.424,39.142 102.424,38.415 102.11,38.101 v1(102.11,37.265)
NetU3_2: U3.2 U5.14 | length 5.8
  Top Layer w0.381: U3.2 84.56,41.64 84.56,42.017 84.38,42.196 84.38,42.854 86.499,44.972 U5.14@86.499,46.425
NRST: B2.3 B2.4 C14.1 J1.5 R2.2 U5.7 | length 39
  Top Layer w0.381: J1.5 65.57,56.215 64.335,54.98 64.335,53.166 65.076,52.425 C14.1@68.25,52.425 ; C14.1 69.225,52.4 69.967,51.658 70.142,51.658 ; B2.4 71.3,48.1 72.475,49.275 v1(72.525,49.275) 70.142,51.658 ; B2.3 71.3,52.675 70.283,51.658 70.142,51.658 ; U5.7 84.544,51.12 86.72,51.12 v1(86.775,51.175)
  Bottom Layer w0.381: R2.2@71.759,50.991 72.06,50.69 72.06,50.239 72.473,49.825 72.473,49.327 v1(72.525,49.275) 72.595,49.275 73.389,50.068 73.389,51.506 74.113,52.231 79.821,52.231 80.938,51.114 86.714,51.114 v1(86.775,51.175)
VCC: J1.1 R1.2 | length 5
  Top Layer w0.5: J1.1 67.255,46.055 v1(68.75,47.55)
  Bottom Layer w0.5: v1(68.75,47.55) 68.75,47.496 68.975,47.271 R1.2
pads on no net: J6. J6.1 J6.8 J6.Cd U4.2 U4.3 U4.4 U4.5 U4.6 U4.7 U4.12 U4.14 U4.15 U4.16 U4.17 U4.19 U4.21 U4.22 U4.25 U5.2 U5.5 U5.6 U5.8 U5.10 U5.18 U5.19 U5.20 U5.23 U5.26 U5.27 U5.28 U5.29 U5.33 U5.35 U5.38 U5.39 U5.40 U5.41 U5.42 U5.43 U5.45 U5.46 U5.47
copper on no net:
  other v3: 107.2,28.15 65.675,69.6

## Polygon pours and split planes (outlines as drawn)
GND on Top Layer "NONET_L01_P-001" (solid, pour order 0): 64,71.25 64.25,71.5 109,71.5 109,26.25 64,26.25 64,71.5
GND on Bottom Layer "NONET_L01_P-001" (solid, pour order 1): 109,71.5 109,26.25 64,26.25 64,71.5

## Silkscreen, mask and mechanical layers (free items; w line width, h text height)
Mechanical 1:
  lines w0.1: 64,26.35 109,26.35 109,32.35 109,71.35 64,71.35 64,26.35